# EAGLE board LilyPad_Rainbow_LED_Panel_v10 (EAGLE 7.5.0), part 1 of 4
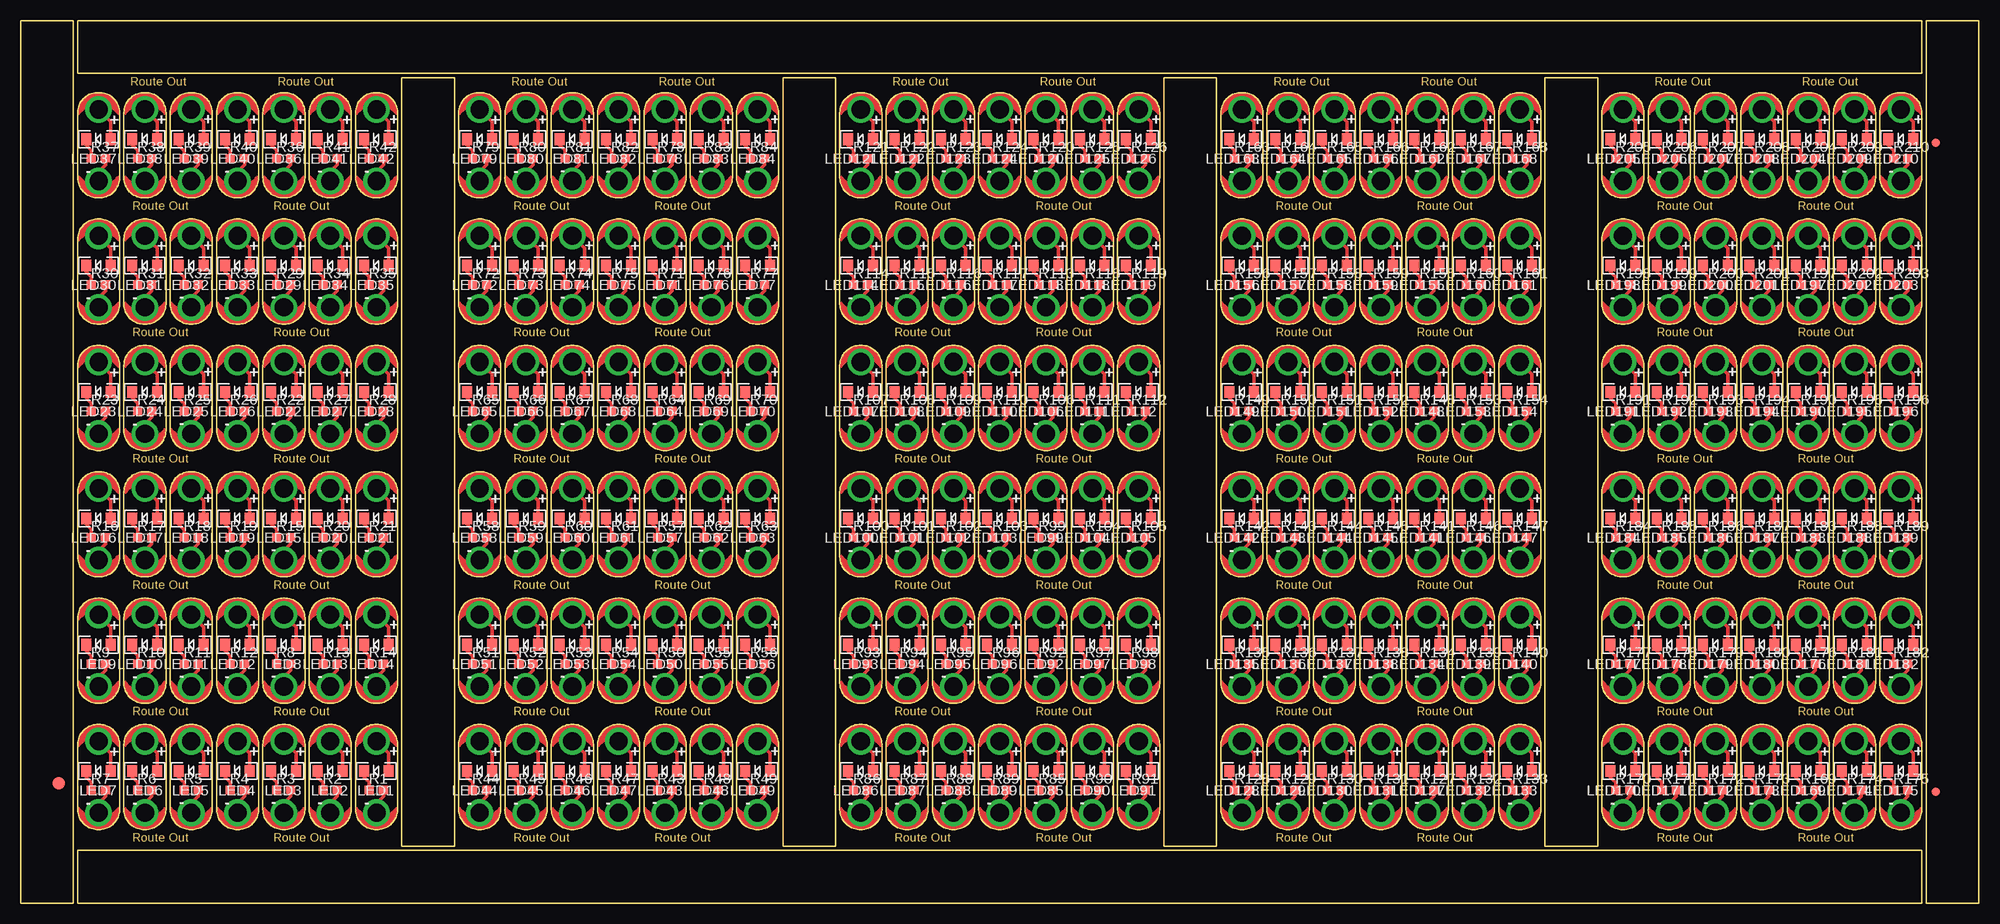
[diagram p0: board, top side]
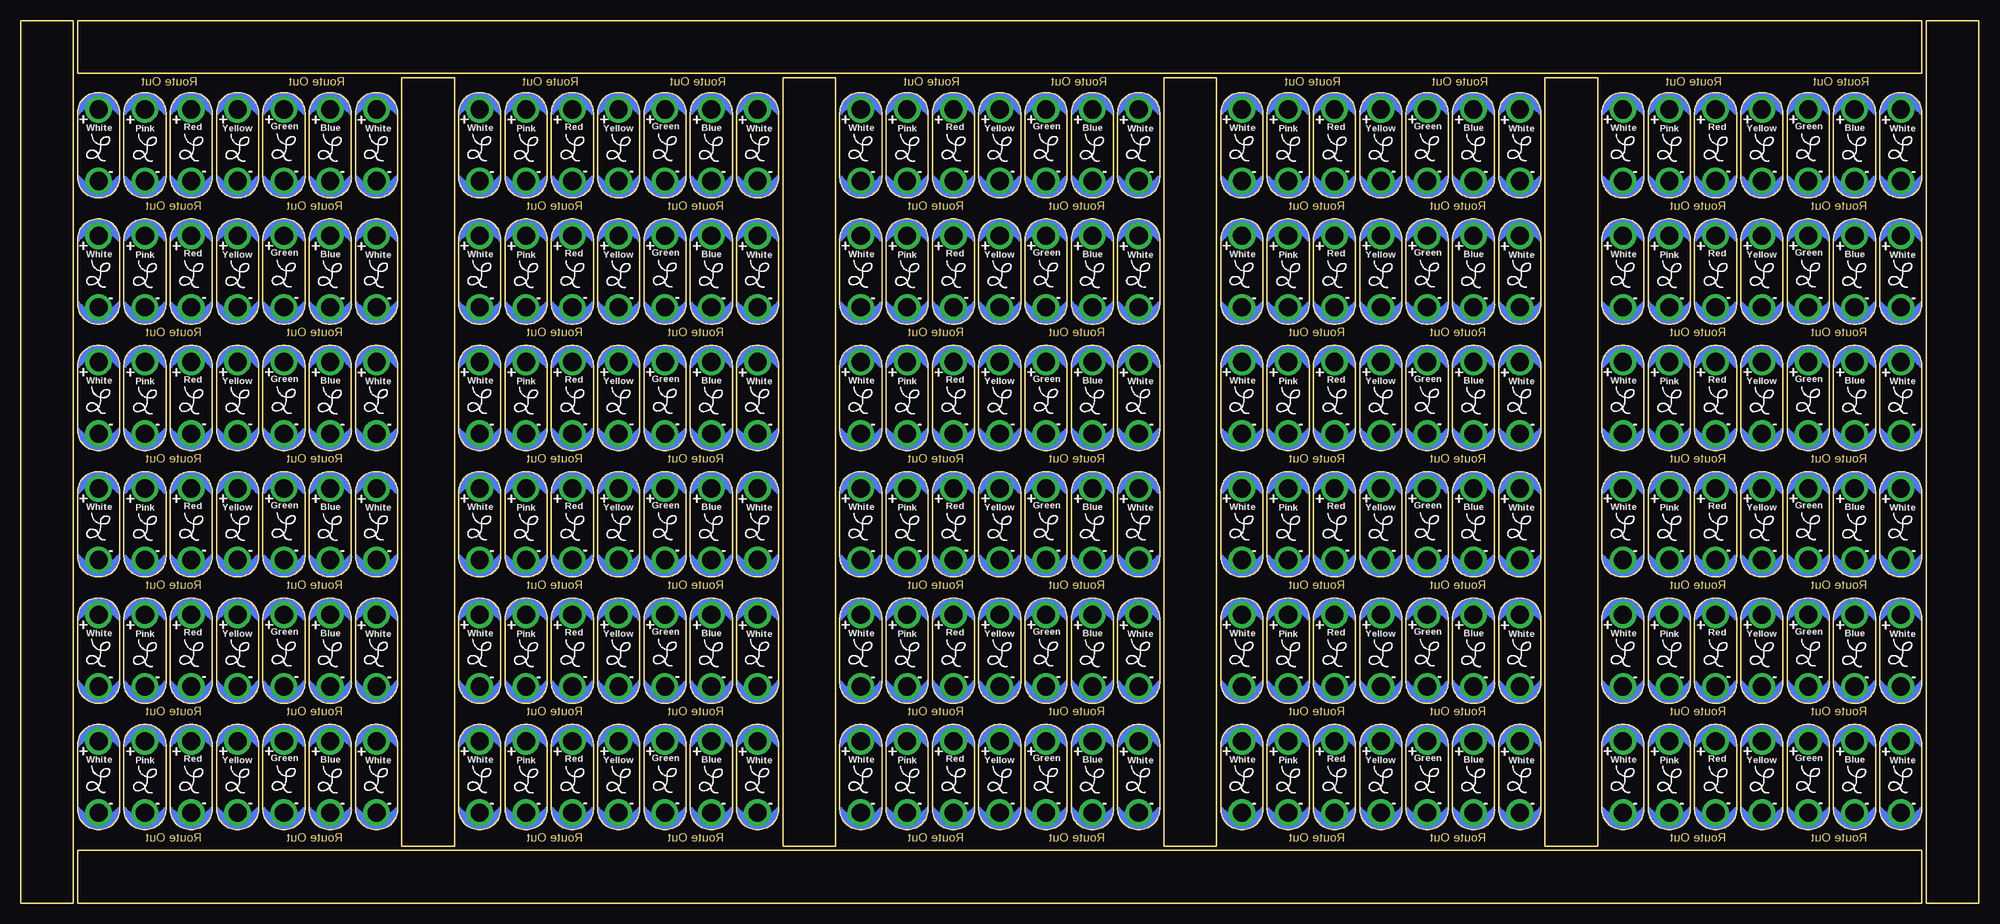
[diagram p1: board, bottom side, seen from below]

Size 236.22 x 106.43 mm. Coordinates in mm from the lower left corner, seen from the top.
Outline: 1308 segments
Copper layers (1*16): Top 0.035mm / dielectric 1.5mm / Bottom 0.035mm
Design rules "SparkFun-2-layer-STANDARD": minimum track width 10mil, minimum drill 20mil, track to track 10mil, track to pad 8mil, pad to pad 8mil, via to via 10mil, smd to smd 8mil, copper to edge 8mil, drill to drill 8mil, minimum pad ring 10mil, minimum via ring 10mil, stop-mask expansion 4mil, vias tented up to drill 25mil, thermal gap 10mil

## Footprints (pad centres in the part's own frame; a part is rotated, then mirrored left to right if it is on the bottom)
FIDUCIAL-1.5X3 = smd 1.5 x 1.5: 1 0,0
FIDUCIAL-1X2 = smd 1 x 1: 1 0,0
LED-1206 = smd 1.2 x 1.4: A -1.5,0; C 1.5,0
PETAL-SMALL-2SIDE = drill 2.2: 1 0,0
0603-RES = smd 1.1 x 1: 1 -0.85,0; 2 0.85,0

## Placement (x,y rotation side)
E$1  [FIDUCIAL-1.5X3]  4.57,14.48 0 top
E$13  [FIDUCIAL-1X2]  231.01,13.46 0 top
E$14  [FIDUCIAL-1X2]  231.01,91.69 180 top
LED1  WHITE  [LED-1206]  42.91,15.93 180 top
LED2  PINK  [LED-1206]  37.32,15.93 180 top
LED3  RED  [LED-1206]  31.73,15.93 180 top
LED4  YELLOW  [LED-1206]  26.14,15.93 180 top
LED5  GREEN  [LED-1206]  20.55,15.93 180 top
LED6  BLUE  [LED-1206]  14.97,15.93 180 top
LED7  WHITE  [LED-1206]  9.38,15.93 180 top
LED8  RED  [LED-1206]  31.73,31.17 180 top
LED9  WHITE  [LED-1206]  9.38,31.17 180 top
LED10  BLUE  [LED-1206]  14.97,31.17 180 top
LED11  GREEN  [LED-1206]  20.55,31.17 180 top
LED12  YELLOW  [LED-1206]  26.14,31.17 180 top
LED13  PINK  [LED-1206]  37.32,31.17 180 top
LED14  WHITE  [LED-1206]  42.91,31.17 180 top
LED15  RED  [LED-1206]  31.73,46.41 180 top
LED16  WHITE  [LED-1206]  9.38,46.41 180 top
LED17  BLUE  [LED-1206]  14.97,46.41 180 top
LED18  GREEN  [LED-1206]  20.55,46.41 180 top
LED19  YELLOW  [LED-1206]  26.14,46.41 180 top
LED20  PINK  [LED-1206]  37.32,46.41 180 top
LED21  WHITE  [LED-1206]  42.91,46.41 180 top
LED22  RED  [LED-1206]  31.73,61.65 180 top
LED23  WHITE  [LED-1206]  9.38,61.65 180 top
LED24  BLUE  [LED-1206]  14.97,61.65 180 top
LED25  GREEN  [LED-1206]  20.55,61.65 180 top
LED26  YELLOW  [LED-1206]  26.14,61.65 180 top
LED27  PINK  [LED-1206]  37.32,61.65 180 top
LED28  WHITE  [LED-1206]  42.91,61.65 180 top
LED29  RED  [LED-1206]  31.73,76.89 180 top
LED30  WHITE  [LED-1206]  9.38,76.89 180 top
LED31  BLUE  [LED-1206]  14.97,76.89 180 top
LED32  GREEN  [LED-1206]  20.55,76.89 180 top
LED33  YELLOW  [LED-1206]  26.14,76.89 180 top
LED34  PINK  [LED-1206]  37.32,76.89 180 top
LED35  WHITE  [LED-1206]  42.91,76.89 180 top
LED36  RED  [LED-1206]  31.73,92.13 180 top
LED37  WHITE  [LED-1206]  9.38,92.13 180 top
LED38  BLUE  [LED-1206]  14.97,92.13 180 top
LED39  GREEN  [LED-1206]  20.55,92.13 180 top
LED40  YELLOW  [LED-1206]  26.14,92.13 180 top
LED41  PINK  [LED-1206]  37.32,92.13 180 top
LED42  WHITE  [LED-1206]  42.91,92.13 180 top
LED43  RED  [LED-1206]  77.7,15.93 180 top
LED44  WHITE  [LED-1206]  55.35,15.93 180 top
LED45  BLUE  [LED-1206]  60.94,15.93 180 top
LED46  GREEN  [LED-1206]  66.53,15.93 180 top
LED47  YELLOW  [LED-1206]  72.12,15.93 180 top
LED48  PINK  [LED-1206]  83.29,15.93 180 top
LED49  WHITE  [LED-1206]  88.88,15.93 180 top
LED50  RED  [LED-1206]  77.7,31.17 180 top
LED51  WHITE  [LED-1206]  55.35,31.17 180 top
LED52  BLUE  [LED-1206]  60.94,31.17 180 top
LED53  GREEN  [LED-1206]  66.53,31.17 180 top
LED54  YELLOW  [LED-1206]  72.12,31.17 180 top
LED55  PINK  [LED-1206]  83.29,31.17 180 top
LED56  WHITE  [LED-1206]  88.88,31.17 180 top
LED57  RED  [LED-1206]  77.7,46.41 180 top
LED58  WHITE  [LED-1206]  55.35,46.41 180 top
LED59  BLUE  [LED-1206]  60.94,46.41 180 top
LED60  GREEN  [LED-1206]  66.53,46.41 180 top
LED61  YELLOW  [LED-1206]  72.12,46.41 180 top
LED62  PINK  [LED-1206]  83.29,46.41 180 top
LED63  WHITE  [LED-1206]  88.88,46.41 180 top
LED64  RED  [LED-1206]  77.7,61.65 180 top
LED65  WHITE  [LED-1206]  55.35,61.65 180 top
LED66  BLUE  [LED-1206]  60.94,61.65 180 top
LED67  GREEN  [LED-1206]  66.53,61.65 180 top
LED68  YELLOW  [LED-1206]  72.12,61.65 180 top
LED69  PINK  [LED-1206]  83.29,61.65 180 top
LED70  WHITE  [LED-1206]  88.88,61.65 180 top
LED71  RED  [LED-1206]  77.7,76.89 180 top
LED72  WHITE  [LED-1206]  55.35,76.89 180 top
LED73  BLUE  [LED-1206]  60.94,76.89 180 top
LED74  GREEN  [LED-1206]  66.53,76.89 180 top
LED75  YELLOW  [LED-1206]  72.12,76.89 180 top
LED76  PINK  [LED-1206]  83.29,76.89 180 top
LED77  WHITE  [LED-1206]  88.88,76.89 180 top
LED78  RED  [LED-1206]  77.7,92.13 180 top
LED79  WHITE  [LED-1206]  55.35,92.13 180 top
LED80  BLUE  [LED-1206]  60.94,92.13 180 top
LED81  GREEN  [LED-1206]  66.53,92.13 180 top
LED82  YELLOW  [LED-1206]  72.12,92.13 180 top
LED83  PINK  [LED-1206]  83.29,92.13 180 top
LED84  WHITE  [LED-1206]  88.88,92.13 180 top
LED85  RED  [LED-1206]  123.68,15.93 180 top
LED86  WHITE  [LED-1206]  101.33,15.93 180 top
LED87  BLUE  [LED-1206]  106.91,15.93 180 top
LED88  GREEN  [LED-1206]  112.5,15.93 180 top
LED89  YELLOW  [LED-1206]  118.09,15.93 180 top
LED90  PINK  [LED-1206]  129.27,15.93 180 top
LED91  WHITE  [LED-1206]  134.85,15.93 180 top
LED92  RED  [LED-1206]  123.68,31.17 180 top
LED93  WHITE  [LED-1206]  101.33,31.17 180 top
LED94  BLUE  [LED-1206]  106.91,31.17 180 top
LED95  GREEN  [LED-1206]  112.5,31.17 180 top
LED96  YELLOW  [LED-1206]  118.09,31.17 180 top
LED97  PINK  [LED-1206]  129.27,31.17 180 top
LED98  WHITE  [LED-1206]  134.85,31.17 180 top
LED99  RED  [LED-1206]  123.68,46.41 180 top
LED100  WHITE  [LED-1206]  101.33,46.41 180 top
LED101  BLUE  [LED-1206]  106.91,46.41 180 top
LED102  GREEN  [LED-1206]  112.5,46.41 180 top
LED103  YELLOW  [LED-1206]  118.09,46.41 180 top
LED104  PINK  [LED-1206]  129.27,46.41 180 top
LED105  WHITE  [LED-1206]  134.85,46.41 180 top
LED106  RED  [LED-1206]  123.68,61.65 180 top
LED107  WHITE  [LED-1206]  101.33,61.65 180 top
LED108  BLUE  [LED-1206]  106.91,61.65 180 top
LED109  GREEN  [LED-1206]  112.5,61.65 180 top
LED110  YELLOW  [LED-1206]  118.09,61.65 180 top
LED111  PINK  [LED-1206]  129.27,61.65 180 top
LED112  WHITE  [LED-1206]  134.85,61.65 180 top
LED113  RED  [LED-1206]  123.68,76.89 180 top
LED114  WHITE  [LED-1206]  101.33,76.89 180 top
LED115  BLUE  [LED-1206]  106.91,76.89 180 top
LED116  GREEN  [LED-1206]  112.5,76.89 180 top
LED117  YELLOW  [LED-1206]  118.09,76.89 180 top
LED118  PINK  [LED-1206]  129.27,76.89 180 top
LED119  WHITE  [LED-1206]  134.85,76.89 180 top
LED120  RED  [LED-1206]  123.68,92.13 180 top
LED121  WHITE  [LED-1206]  101.33,92.13 180 top
LED122  BLUE  [LED-1206]  106.91,92.13 180 top
LED123  GREEN  [LED-1206]  112.5,92.13 180 top
LED124  YELLOW  [LED-1206]  118.09,92.13 180 top
LED125  PINK  [LED-1206]  129.27,92.13 180 top
LED126  WHITE  [LED-1206]  134.85,92.13 180 top
LED127  RED  [LED-1206]  169.65,15.93 180 top
LED128  WHITE  [LED-1206]  147.3,15.93 180 top
LED129  BLUE  [LED-1206]  152.89,15.93 180 top
LED130  GREEN  [LED-1206]  158.48,15.93 180 top
LED131  YELLOW  [LED-1206]  164.06,15.93 180 top
LED132  PINK  [LED-1206]  175.24,15.93 180 top
LED133  WHITE  [LED-1206]  180.83,15.93 180 top
LED134  RED  [LED-1206]  169.65,31.17 180 top
LED135  WHITE  [LED-1206]  147.3,31.17 180 top
LED136  BLUE  [LED-1206]  152.89,31.17 180 top
LED137  GREEN  [LED-1206]  158.48,31.17 180 top
LED138  YELLOW  [LED-1206]  164.06,31.17 180 top
LED139  PINK  [LED-1206]  175.24,31.17 180 top
LED140  WHITE  [LED-1206]  180.83,31.17 180 top
LED141  RED  [LED-1206]  169.65,46.41 180 top
LED142  WHITE  [LED-1206]  147.3,46.41 180 top
LED143  BLUE  [LED-1206]  152.89,46.41 180 top
LED144  GREEN  [LED-1206]  158.48,46.41 180 top
LED145  YELLOW  [LED-1206]  164.06,46.41 180 top
LED146  PINK  [LED-1206]  175.24,46.41 180 top
LED147  WHITE  [LED-1206]  180.83,46.41 180 top
LED148  RED  [LED-1206]  169.65,61.65 180 top
LED149  WHITE  [LED-1206]  147.3,61.65 180 top
LED150  BLUE  [LED-1206]  152.89,61.65 180 top
LED151  GREEN  [LED-1206]  158.48,61.65 180 top
LED152  YELLOW  [LED-1206]  164.06,61.65 180 top
LED153  PINK  [LED-1206]  175.24,61.65 180 top
LED154  WHITE  [LED-1206]  180.83,61.65 180 top
LED155  RED  [LED-1206]  169.65,76.89 180 top
LED156  WHITE  [LED-1206]  147.3,76.89 180 top
LED157  BLUE  [LED-1206]  152.89,76.89 180 top
LED158  GREEN  [LED-1206]  158.48,76.89 180 top
LED159  YELLOW  [LED-1206]  164.06,76.89 180 top
LED160  PINK  [LED-1206]  175.24,76.89 180 top
LED161  WHITE  [LED-1206]  180.83,76.89 180 top
LED162  RED  [LED-1206]  169.65,92.13 180 top
LED163  WHITE  [LED-1206]  147.3,92.13 180 top
LED164  BLUE  [LED-1206]  152.89,92.13 180 top
LED165  GREEN  [LED-1206]  158.48,92.13 180 top
LED166  YELLOW  [LED-1206]  164.06,92.13 180 top
LED167  PINK  [LED-1206]  175.24,92.13 180 top
LED168  WHITE  [LED-1206]  180.83,92.13 180 top
LED169  RED  [LED-1206]  215.63,15.93 180 top
LED170  WHITE  [LED-1206]  193.27,15.93 180 top
LED171  BLUE  [LED-1206]  198.86,15.93 180 top
LED172  GREEN  [LED-1206]  204.45,15.93 180 top
LED173  YELLOW  [LED-1206]  210.04,15.93 180 top
LED174  PINK  [LED-1206]  221.21,15.93 180 top
LED175  WHITE  [LED-1206]  226.8,15.93 180 top
LED176  RED  [LED-1206]  215.63,31.17 180 top
LED177  WHITE  [LED-1206]  193.27,31.17 180 top
LED178  BLUE  [LED-1206]  198.86,31.17 180 top
LED179  GREEN  [LED-1206]  204.45,31.17 180 top
LED180  YELLOW  [LED-1206]  210.04,31.17 180 top
LED181  PINK  [LED-1206]  221.21,31.17 180 top
LED182  WHITE  [LED-1206]  226.8,31.17 180 top
LED183  RED  [LED-1206]  215.63,46.41 180 top
LED184  WHITE  [LED-1206]  193.27,46.41 180 top
LED185  BLUE  [LED-1206]  198.86,46.41 180 top
LED186  GREEN  [LED-1206]  204.45,46.41 180 top
LED187  YELLOW  [LED-1206]  210.04,46.41 180 top
LED188  PINK  [LED-1206]  221.21,46.41 180 top
LED189  WHITE  [LED-1206]  226.8,46.41 180 top
LED190  RED  [LED-1206]  215.63,61.65 180 top
LED191  WHITE  [LED-1206]  193.27,61.65 180 top
LED192  BLUE  [LED-1206]  198.86,61.65 180 top
LED193  GREEN  [LED-1206]  204.45,61.65 180 top
LED194  YELLOW  [LED-1206]  210.04,61.65 180 top
LED195  PINK  [LED-1206]  221.21,61.65 180 top
LED196  WHITE  [LED-1206]  226.8,61.65 180 top
LED197  RED  [LED-1206]  215.63,76.89 180 top
LED198  WHITE  [LED-1206]  193.27,76.89 180 top
LED199  BLUE  [LED-1206]  198.86,76.89 180 top
LED200  GREEN  [LED-1206]  204.45,76.89 180 top
LED201  YELLOW  [LED-1206]  210.04,76.89 180 top
LED202  PINK  [LED-1206]  221.21,76.89 180 top
LED203  WHITE  [LED-1206]  226.8,76.89 180 top
LED204  RED  [LED-1206]  215.63,92.13 180 top
LED205  WHITE  [LED-1206]  193.27,92.13 180 top
LED206  BLUE  [LED-1206]  198.86,92.13 180 top
LED207  GREEN  [LED-1206]  204.45,92.13 180 top
LED208  YELLOW  [LED-1206]  210.04,92.13 180 top
LED209  PINK  [LED-1206]  221.21,92.13 180 top
LED210  WHITE  [LED-1206]  226.8,92.13 180 top
LED+1  SEWTAP6  [PETAL-SMALL-2SIDE]  42.93,19.53 180 top
LED+2  SEWTAP6  [PETAL-SMALL-2SIDE]  37.34,19.53 180 top
LED+3  SEWTAP6  [PETAL-SMALL-2SIDE]  31.75,19.53 180 top
LED+4  SEWTAP6  [PETAL-SMALL-2SIDE]  26.16,19.53 180 top
LED+5  SEWTAP6  [PETAL-SMALL-2SIDE]  20.57,19.53 180 top
LED+6  SEWTAP6  [PETAL-SMALL-2SIDE]  14.99,19.53 180 top
LED+7  SEWTAP6  [PETAL-SMALL-2SIDE]  9.4,19.53 180 top
LED+8  SEWTAP6  [PETAL-SMALL-2SIDE]  31.75,34.77 180 top
LED+9  SEWTAP6  [PETAL-SMALL-2SIDE]  9.4,34.77 180 top
LED+10  SEWTAP6  [PETAL-SMALL-2SIDE]  14.99,34.77 180 top
LED+11  SEWTAP6  [PETAL-SMALL-2SIDE]  20.57,34.77 180 top
LED+12  SEWTAP6  [PETAL-SMALL-2SIDE]  26.16,34.77 180 top
LED+13  SEWTAP6  [PETAL-SMALL-2SIDE]  37.34,34.77 180 top
LED+14  SEWTAP6  [PETAL-SMALL-2SIDE]  42.93,34.77 180 top
LED+15  SEWTAP6  [PETAL-SMALL-2SIDE]  31.75,50.01 180 top
LED+16  SEWTAP6  [PETAL-SMALL-2SIDE]  9.4,50.01 180 top
LED+17  SEWTAP6  [PETAL-SMALL-2SIDE]  14.99,50.01 180 top
LED+18  SEWTAP6  [PETAL-SMALL-2SIDE]  20.57,50.01 180 top
LED+19  SEWTAP6  [PETAL-SMALL-2SIDE]  26.16,50.01 180 top
LED+20  SEWTAP6  [PETAL-SMALL-2SIDE]  37.34,50.01 180 top
LED+21  SEWTAP6  [PETAL-SMALL-2SIDE]  42.93,50.01 180 top
LED+22  SEWTAP6  [PETAL-SMALL-2SIDE]  31.75,65.25 180 top
LED+23  SEWTAP6  [PETAL-SMALL-2SIDE]  9.4,65.25 180 top
LED+24  SEWTAP6  [PETAL-SMALL-2SIDE]  14.99,65.25 180 top
LED+25  SEWTAP6  [PETAL-SMALL-2SIDE]  20.57,65.25 180 top
LED+26  SEWTAP6  [PETAL-SMALL-2SIDE]  26.16,65.25 180 top
LED+27  SEWTAP6  [PETAL-SMALL-2SIDE]  37.34,65.25 180 top
LED+28  SEWTAP6  [PETAL-SMALL-2SIDE]  42.93,65.25 180 top
LED+29  SEWTAP6  [PETAL-SMALL-2SIDE]  31.75,80.49 180 top
LED+30  SEWTAP6  [PETAL-SMALL-2SIDE]  9.4,80.49 180 top
LED+31  SEWTAP6  [PETAL-SMALL-2SIDE]  14.99,80.49 180 top
LED+32  SEWTAP6  [PETAL-SMALL-2SIDE]  20.57,80.49 180 top
LED+33  SEWTAP6  [PETAL-SMALL-2SIDE]  26.16,80.49 180 top
LED+34  SEWTAP6  [PETAL-SMALL-2SIDE]  37.34,80.49 180 top
LED+35  SEWTAP6  [PETAL-SMALL-2SIDE]  42.93,80.49 180 top
LED+36  SEWTAP6  [PETAL-SMALL-2SIDE]  31.75,95.73 180 top
LED+37  SEWTAP6  [PETAL-SMALL-2SIDE]  9.4,95.73 180 top
LED+38  SEWTAP6  [PETAL-SMALL-2SIDE]  14.99,95.73 180 top
LED+39  SEWTAP6  [PETAL-SMALL-2SIDE]  20.57,95.73 180 top
LED+40  SEWTAP6  [PETAL-SMALL-2SIDE]  26.16,95.73 180 top
LED+41  SEWTAP6  [PETAL-SMALL-2SIDE]  37.34,95.73 180 top
LED+42  SEWTAP6  [PETAL-SMALL-2SIDE]  42.93,95.73 180 top
LED+43  SEWTAP6  [PETAL-SMALL-2SIDE]  77.72,19.53 180 top
LED+44  SEWTAP6  [PETAL-SMALL-2SIDE]  55.37,19.53 180 top
LED+45  SEWTAP6  [PETAL-SMALL-2SIDE]  60.96,19.53 180 top
LED+46  SEWTAP6  [PETAL-SMALL-2SIDE]  66.55,19.53 180 top
LED+47  SEWTAP6  [PETAL-SMALL-2SIDE]  72.14,19.53 180 top
LED+48  SEWTAP6  [PETAL-SMALL-2SIDE]  83.31,19.53 180 top
LED+49  SEWTAP6  [PETAL-SMALL-2SIDE]  88.9,19.53 180 top
LED+50  SEWTAP6  [PETAL-SMALL-2SIDE]  77.72,34.77 180 top
LED+51  SEWTAP6  [PETAL-SMALL-2SIDE]  55.37,34.77 180 top
LED+52  SEWTAP6  [PETAL-SMALL-2SIDE]  60.96,34.77 180 top
LED+53  SEWTAP6  [PETAL-SMALL-2SIDE]  66.55,34.77 180 top
LED+54  SEWTAP6  [PETAL-SMALL-2SIDE]  72.14,34.77 180 top
LED+55  SEWTAP6  [PETAL-SMALL-2SIDE]  83.31,34.77 180 top
LED+56  SEWTAP6  [PETAL-SMALL-2SIDE]  88.9,34.77 180 top
LED+57  SEWTAP6  [PETAL-SMALL-2SIDE]  77.72,50.01 180 top
LED+58  SEWTAP6  [PETAL-SMALL-2SIDE]  55.37,50.01 180 top
LED+59  SEWTAP6  [PETAL-SMALL-2SIDE]  60.96,50.01 180 top
LED+60  SEWTAP6  [PETAL-SMALL-2SIDE]  66.55,50.01 180 top
LED+61  SEWTAP6  [PETAL-SMALL-2SIDE]  72.14,50.01 180 top
LED+62  SEWTAP6  [PETAL-SMALL-2SIDE]  83.31,50.01 180 top
LED+63  SEWTAP6  [PETAL-SMALL-2SIDE]  88.9,50.01 180 top
LED+64  SEWTAP6  [PETAL-SMALL-2SIDE]  77.72,65.25 180 top
LED+65  SEWTAP6  [PETAL-SMALL-2SIDE]  55.37,65.25 180 top
LED+66  SEWTAP6  [PETAL-SMALL-2SIDE]  60.96,65.25 180 top
LED+67  SEWTAP6  [PETAL-SMALL-2SIDE]  66.55,65.25 180 top
LED+68  SEWTAP6  [PETAL-SMALL-2SIDE]  72.14,65.25 180 top
LED+69  SEWTAP6  [PETAL-SMALL-2SIDE]  83.31,65.25 180 top
LED+70  SEWTAP6  [PETAL-SMALL-2SIDE]  88.9,65.25 180 top
LED+71  SEWTAP6  [PETAL-SMALL-2SIDE]  77.72,80.49 180 top
LED+72  SEWTAP6  [PETAL-SMALL-2SIDE]  55.37,80.49 180 top
LED+73  SEWTAP6  [PETAL-SMALL-2SIDE]  60.96,80.49 180 top
LED+74  SEWTAP6  [PETAL-SMALL-2SIDE]  66.55,80.49 180 top
LED+75  SEWTAP6  [PETAL-SMALL-2SIDE]  72.14,80.49 180 top
LED+76  SEWTAP6  [PETAL-SMALL-2SIDE]  83.31,80.49 180 top
LED+77  SEWTAP6  [PETAL-SMALL-2SIDE]  88.9,80.49 180 top
LED+78  SEWTAP6  [PETAL-SMALL-2SIDE]  77.72,95.73 180 top
LED+79  SEWTAP6  [PETAL-SMALL-2SIDE]  55.37,95.73 180 top
LED+80  SEWTAP6  [PETAL-SMALL-2SIDE]  60.96,95.73 180 top
LED+81  SEWTAP6  [PETAL-SMALL-2SIDE]  66.55,95.73 180 top
LED+82  SEWTAP6  [PETAL-SMALL-2SIDE]  72.14,95.73 180 top
LED+83  SEWTAP6  [PETAL-SMALL-2SIDE]  83.31,95.73 180 top
LED+84  SEWTAP6  [PETAL-SMALL-2SIDE]  88.9,95.73 180 top
LED+85  SEWTAP6  [PETAL-SMALL-2SIDE]  123.7,19.53 180 top
LED+86  SEWTAP6  [PETAL-SMALL-2SIDE]  101.35,19.53 180 top
LED+87  SEWTAP6  [PETAL-SMALL-2SIDE]  106.93,19.53 180 top
LED+88  SEWTAP6  [PETAL-SMALL-2SIDE]  112.52,19.53 180 top
LED+89  SEWTAP6  [PETAL-SMALL-2SIDE]  118.11,19.53 180 top
LED+90  SEWTAP6  [PETAL-SMALL-2SIDE]  129.29,19.53 180 top
LED+91  SEWTAP6  [PETAL-SMALL-2SIDE]  134.87,19.53 180 top
LED+92  SEWTAP6  [PETAL-SMALL-2SIDE]  123.7,34.77 180 top
LED+93  SEWTAP6  [PETAL-SMALL-2SIDE]  101.35,34.77 180 top
LED+94  SEWTAP6  [PETAL-SMALL-2SIDE]  106.93,34.77 180 top
LED+95  SEWTAP6  [PETAL-SMALL-2SIDE]  112.52,34.77 180 top
LED+96  SEWTAP6  [PETAL-SMALL-2SIDE]  118.11,34.77 180 top
LED+97  SEWTAP6  [PETAL-SMALL-2SIDE]  129.29,34.77 180 top
LED+98  SEWTAP6  [PETAL-SMALL-2SIDE]  134.87,34.77 180 top
LED+99  SEWTAP6  [PETAL-SMALL-2SIDE]  123.7,50.01 180 top
LED+100  SEWTAP6  [PETAL-SMALL-2SIDE]  101.35,50.01 180 top
LED+101  SEWTAP6  [PETAL-SMALL-2SIDE]  106.93,50.01 180 top
LED+102  SEWTAP6  [PETAL-SMALL-2SIDE]  112.52,50.01 180 top
LED+103  SEWTAP6  [PETAL-SMALL-2SIDE]  118.11,50.01 180 top
LED+104  SEWTAP6  [PETAL-SMALL-2SIDE]  129.29,50.01 180 top
LED+105  SEWTAP6  [PETAL-SMALL-2SIDE]  134.87,50.01 180 top
LED+106  SEWTAP6  [PETAL-SMALL-2SIDE]  123.7,65.25 180 top
LED+107  SEWTAP6  [PETAL-SMALL-2SIDE]  101.35,65.25 180 top
LED+108  SEWTAP6  [PETAL-SMALL-2SIDE]  106.93,65.25 180 top
LED+109  SEWTAP6  [PETAL-SMALL-2SIDE]  112.52,65.25 180 top
LED+110  SEWTAP6  [PETAL-SMALL-2SIDE]  118.11,65.25 180 top
LED+111  SEWTAP6  [PETAL-SMALL-2SIDE]  129.29,65.25 180 top
LED+112  SEWTAP6  [PETAL-SMALL-2SIDE]  134.87,65.25 180 top
LED+113  SEWTAP6  [PETAL-SMALL-2SIDE]  123.7,80.49 180 top
LED+114  SEWTAP6  [PETAL-SMALL-2SIDE]  101.35,80.49 180 top
LED+115  SEWTAP6  [PETAL-SMALL-2SIDE]  106.93,80.49 180 top
LED+116  SEWTAP6  [PETAL-SMALL-2SIDE]  112.52,80.49 180 top
LED+117  SEWTAP6  [PETAL-SMALL-2SIDE]  118.11,80.49 180 top
LED+118  SEWTAP6  [PETAL-SMALL-2SIDE]  129.29,80.49 180 top
LED+119  SEWTAP6  [PETAL-SMALL-2SIDE]  134.87,80.49 180 top
LED+120  SEWTAP6  [PETAL-SMALL-2SIDE]  123.7,95.73 180 top
LED+121  SEWTAP6  [PETAL-SMALL-2SIDE]  101.35,95.73 180 top
LED+122  SEWTAP6  [PETAL-SMALL-2SIDE]  106.93,95.73 180 top
LED+123  SEWTAP6  [PETAL-SMALL-2SIDE]  112.52,95.73 180 top
LED+124  SEWTAP6  [PETAL-SMALL-2SIDE]  118.11,95.73 180 top
LED+125  SEWTAP6  [PETAL-SMALL-2SIDE]  129.29,95.73 180 top
LED+126  SEWTAP6  [PETAL-SMALL-2SIDE]  134.87,95.73 180 top
LED+127  SEWTAP6  [PETAL-SMALL-2SIDE]  169.67,19.53 180 top
LED+128  SEWTAP6  [PETAL-SMALL-2SIDE]  147.32,19.53 180 top
LED+129  SEWTAP6  [PETAL-SMALL-2SIDE]  152.91,19.53 180 top
LED+130  SEWTAP6  [PETAL-SMALL-2SIDE]  158.5,19.53 180 top
LED+131  SEWTAP6  [PETAL-SMALL-2SIDE]  164.08,19.53 180 top
LED+132  SEWTAP6  [PETAL-SMALL-2SIDE]  175.26,19.53 180 top
LED+133  SEWTAP6  [PETAL-SMALL-2SIDE]  180.85,19.53 180 top
LED+134  SEWTAP6  [PETAL-SMALL-2SIDE]  169.67,34.77 180 top
LED+135  SEWTAP6  [PETAL-SMALL-2SIDE]  147.32,34.77 180 top
LED+136  SEWTAP6  [PETAL-SMALL-2SIDE]  152.91,34.77 180 top
LED+137  SEWTAP6  [PETAL-SMALL-2SIDE]  158.5,34.77 180 top
LED+138  SEWTAP6  [PETAL-SMALL-2SIDE]  164.08,34.77 180 top
LED+139  SEWTAP6  [PETAL-SMALL-2SIDE]  175.26,34.77 180 top
LED+140  SEWTAP6  [PETAL-SMALL-2SIDE]  180.85,34.77 180 top
LED+141  SEWTAP6  [PETAL-SMALL-2SIDE]  169.67,50.01 180 top
LED+142  SEWTAP6  [PETAL-SMALL-2SIDE]  147.32,50.01 180 top
LED+143  SEWTAP6  [PETAL-SMALL-2SIDE]  152.91,50.01 180 top
LED+144  SEWTAP6  [PETAL-SMALL-2SIDE]  158.5,50.01 180 top
LED+145  SEWTAP6  [PETAL-SMALL-2SIDE]  164.08,50.01 180 top
LED+146  SEWTAP6  [PETAL-SMALL-2SIDE]  175.26,50.01 180 top
LED+147  SEWTAP6  [PETAL-SMALL-2SIDE]  180.85,50.01 180 top
LED+148  SEWTAP6  [PETAL-SMALL-2SIDE]  169.67,65.25 180 top
LED+149  SEWTAP6  [PETAL-SMALL-2SIDE]  147.32,65.25 180 top
LED+150  SEWTAP6  [PETAL-SMALL-2SIDE]  152.91,65.25 180 top
LED+151  SEWTAP6  [PETAL-SMALL-2SIDE]  158.5,65.25 180 top
LED+152  SEWTAP6  [PETAL-SMALL-2SIDE]  164.08,65.25 180 top
LED+153  SEWTAP6  [PETAL-SMALL-2SIDE]  175.26,65.25 180 top
LED+154  SEWTAP6  [PETAL-SMALL-2SIDE]  180.85,65.25 180 top
LED+155  SEWTAP6  [PETAL-SMALL-2SIDE]  169.67,80.49 180 top
LED+156  SEWTAP6  [PETAL-SMALL-2SIDE]  147.32,80.49 180 top
LED+157  SEWTAP6  [PETAL-SMALL-2SIDE]  152.91,80.49 180 top
LED+158  SEWTAP6  [PETAL-SMALL-2SIDE]  158.5,80.49 180 top
LED+159  SEWTAP6  [PETAL-SMALL-2SIDE]  164.08,80.49 180 top
LED+160  SEWTAP6  [PETAL-SMALL-2SIDE]  175.26,80.49 180 top
LED+161  SEWTAP6  [PETAL-SMALL-2SIDE]  180.85,80.49 180 top
LED+162  SEWTAP6  [PETAL-SMALL-2SIDE]  169.67,95.73 180 top
LED+163  SEWTAP6  [PETAL-SMALL-2SIDE]  147.32,95.73 180 top
LED+164  SEWTAP6  [PETAL-SMALL-2SIDE]  152.91,95.73 180 top
LED+165  SEWTAP6  [PETAL-SMALL-2SIDE]  158.5,95.73 180 top
LED+166  SEWTAP6  [PETAL-SMALL-2SIDE]  164.08,95.73 180 top
LED+167  SEWTAP6  [PETAL-SMALL-2SIDE]  175.26,95.73 180 top
LED+168  SEWTAP6  [PETAL-SMALL-2SIDE]  180.85,95.73 180 top
LED+169  SEWTAP6  [PETAL-SMALL-2SIDE]  215.65,19.53 180 top
LED+170  SEWTAP6  [PETAL-SMALL-2SIDE]  193.29,19.53 180 top
LED+171  SEWTAP6  [PETAL-SMALL-2SIDE]  198.88,19.53 180 top
LED+172  SEWTAP6  [PETAL-SMALL-2SIDE]  204.47,19.53 180 top
LED+173  SEWTAP6  [PETAL-SMALL-2SIDE]  210.06,19.53 180 top
LED+174  SEWTAP6  [PETAL-SMALL-2SIDE]  221.23,19.53 180 top
LED+175  SEWTAP6  [PETAL-SMALL-2SIDE]  226.82,19.53 180 top
LED+176  SEWTAP6  [PETAL-SMALL-2SIDE]  215.65,34.77 180 top
LED+177  SEWTAP6  [PETAL-SMALL-2SIDE]  193.29,34.77 180 top
LED+178  SEWTAP6  [PETAL-SMALL-2SIDE]  198.88,34.77 180 top
LED+179  SEWTAP6  [PETAL-SMALL-2SIDE]  204.47,34.77 180 top
LED+180  SEWTAP6  [PETAL-SMALL-2SIDE]  210.06,34.77 180 top
LED+181  SEWTAP6  [PETAL-SMALL-2SIDE]  221.23,34.77 180 top
LED+182  SEWTAP6  [PETAL-SMALL-2SIDE]  226.82,34.77 180 top
LED+183  SEWTAP6  [PETAL-SMALL-2SIDE]  215.65,50.01 180 top
LED+184  SEWTAP6  [PETAL-SMALL-2SIDE]  193.29,50.01 180 top
LED+185  SEWTAP6  [PETAL-SMALL-2SIDE]  198.88,50.01 180 top
LED+186  SEWTAP6  [PETAL-SMALL-2SIDE]  204.47,50.01 180 top
LED+187  SEWTAP6  [PETAL-SMALL-2SIDE]  210.06,50.01 180 top
LED+188  SEWTAP6  [PETAL-SMALL-2SIDE]  221.23,50.01 180 top
LED+189  SEWTAP6  [PETAL-SMALL-2SIDE]  226.82,50.01 180 top
LED+190  SEWTAP6  [PETAL-SMALL-2SIDE]  215.65,65.25 180 top
LED+191  SEWTAP6  [PETAL-SMALL-2SIDE]  193.29,65.25 180 top
LED+192  SEWTAP6  [PETAL-SMALL-2SIDE]  198.88,65.25 180 top
LED+193  SEWTAP6  [PETAL-SMALL-2SIDE]  204.47,65.25 180 top
LED+194  SEWTAP6  [PETAL-SMALL-2SIDE]  210.06,65.25 180 top
LED+195  SEWTAP6  [PETAL-SMALL-2SIDE]  221.23,65.25 180 top
LED+196  SEWTAP6  [PETAL-SMALL-2SIDE]  226.82,65.25 180 top
LED+197  SEWTAP6  [PETAL-SMALL-2SIDE]  215.65,80.49 180 top
LED+198  SEWTAP6  [PETAL-SMALL-2SIDE]  193.29,80.49 180 top
LED+199  SEWTAP6  [PETAL-SMALL-2SIDE]  198.88,80.49 180 top
LED+200  SEWTAP6  [PETAL-SMALL-2SIDE]  204.47,80.49 180 top
LED+201  SEWTAP6  [PETAL-SMALL-2SIDE]  210.06,80.49 180 top
LED+202  SEWTAP6  [PETAL-SMALL-2SIDE]  221.23,80.49 180 top
LED+203  SEWTAP6  [PETAL-SMALL-2SIDE]  226.82,80.49 180 top
LED+204  SEWTAP6  [PETAL-SMALL-2SIDE]  215.65,95.73 180 top
LED+205  SEWTAP6  [PETAL-SMALL-2SIDE]  193.29,95.73 180 top
LED+206  SEWTAP6  [PETAL-SMALL-2SIDE]  198.88,95.73 180 top
LED+207  SEWTAP6  [PETAL-SMALL-2SIDE]  204.47,95.73 180 top
LED+208  SEWTAP6  [PETAL-SMALL-2SIDE]  210.06,95.73 180 top
LED+209  SEWTAP6  [PETAL-SMALL-2SIDE]  221.23,95.73 180 top
LED+210  SEWTAP6  [PETAL-SMALL-2SIDE]  226.82,95.73 180 top
LED-1  SEWTAP6  [PETAL-SMALL-2SIDE]  42.93,10.9 0 top
LED-2  SEWTAP6  [PETAL-SMALL-2SIDE]  37.34,10.9 0 top
LED-3  SEWTAP6  [PETAL-SMALL-2SIDE]  31.75,10.9 0 top
LED-4  SEWTAP6  [PETAL-SMALL-2SIDE]  26.16,10.9 0 top
LED-5  SEWTAP6  [PETAL-SMALL-2SIDE]  20.57,10.9 0 top
LED-6  SEWTAP6  [PETAL-SMALL-2SIDE]  14.99,10.9 0 top
LED-7  SEWTAP6  [PETAL-SMALL-2SIDE]  9.4,10.9 0 top
LED-8  SEWTAP6  [PETAL-SMALL-2SIDE]  31.75,26.14 0 top
LED-9  SEWTAP6  [PETAL-SMALL-2SIDE]  9.4,26.14 0 top
LED-10  SEWTAP6  [PETAL-SMALL-2SIDE]  14.99,26.14 0 top
LED-11  SEWTAP6  [PETAL-SMALL-2SIDE]  20.57,26.14 0 top
LED-12  SEWTAP6  [PETAL-SMALL-2SIDE]  26.16,26.14 0 top
LED-13  SEWTAP6  [PETAL-SMALL-2SIDE]  37.34,26.14 0 top
LED-14  SEWTAP6  [PETAL-SMALL-2SIDE]  42.93,26.14 0 top
LED-15  SEWTAP6  [PETAL-SMALL-2SIDE]  31.75,41.38 0 top
LED-16  SEWTAP6  [PETAL-SMALL-2SIDE]  9.4,41.38 0 top
LED-17  SEWTAP6  [PETAL-SMALL-2SIDE]  14.99,41.38 0 top
LED-18  SEWTAP6  [PETAL-SMALL-2SIDE]  20.57,41.38 0 top
LED-19  SEWTAP6  [PETAL-SMALL-2SIDE]  26.16,41.38 0 top
LED-20  SEWTAP6  [PETAL-SMALL-2SIDE]  37.34,41.38 0 top
LED-21  SEWTAP6  [PETAL-SMALL-2SIDE]  42.93,41.38 0 top
LED-22  SEWTAP6  [PETAL-SMALL-2SIDE]  31.75,56.62 0 top
LED-23  SEWTAP6  [PETAL-SMALL-2SIDE]  9.4,56.62 0 top
LED-24  SEWTAP6  [PETAL-SMALL-2SIDE]  14.99,56.62 0 top
LED-25  SEWTAP6  [PETAL-SMALL-2SIDE]  20.57,56.62 0 top
LED-26  SEWTAP6  [PETAL-SMALL-2SIDE]  26.16,56.62 0 top
LED-27  SEWTAP6  [PETAL-SMALL-2SIDE]  37.34,56.62 0 top
LED-28  SEWTAP6  [PETAL-SMALL-2SIDE]  42.93,56.62 0 top
LED-29  SEWTAP6  [PETAL-SMALL-2SIDE]  31.75,71.86 0 top
LED-30  SEWTAP6  [PETAL-SMALL-2SIDE]  9.4,71.86 0 top
LED-31  SEWTAP6  [PETAL-SMALL-2SIDE]  14.99,71.86 0 top
LED-32  SEWTAP6  [PETAL-SMALL-2SIDE]  20.57,71.86 0 top
LED-33  SEWTAP6  [PETAL-SMALL-2SIDE]  26.16,71.86 0 top
LED-34  SEWTAP6  [PETAL-SMALL-2SIDE]  37.34,71.86 0 top
LED-35  SEWTAP6  [PETAL-SMALL-2SIDE]  42.93,71.86 0 top
LED-36  SEWTAP6  [PETAL-SMALL-2SIDE]  31.75,87.1 0 top
LED-37  SEWTAP6  [PETAL-SMALL-2SIDE]  9.4,87.1 0 top
LED-38  SEWTAP6  [PETAL-SMALL-2SIDE]  14.99,87.1 0 top
LED-39  SEWTAP6  [PETAL-SMALL-2SIDE]  20.57,87.1 0 top
LED-40  SEWTAP6  [PETAL-SMALL-2SIDE]  26.16,87.1 0 top
LED-41  SEWTAP6  [PETAL-SMALL-2SIDE]  37.34,87.1 0 top
LED-42  SEWTAP6  [PETAL-SMALL-2SIDE]  42.93,87.1 0 top
LED-43  SEWTAP6  [PETAL-SMALL-2SIDE]  77.72,10.9 0 top
LED-44  SEWTAP6  [PETAL-SMALL-2SIDE]  55.37,10.9 0 top
LED-45  SEWTAP6  [PETAL-SMALL-2SIDE]  60.96,10.9 0 top
LED-46  SEWTAP6  [PETAL-SMALL-2SIDE]  66.55,10.9 0 top
LED-47  SEWTAP6  [PETAL-SMALL-2SIDE]  72.14,10.9 0 top
LED-48  SEWTAP6  [PETAL-SMALL-2SIDE]  83.31,10.9 0 top
LED-49  SEWTAP6  [PETAL-SMALL-2SIDE]  88.9,10.9 0 top
LED-50  SEWTAP6  [PETAL-SMALL-2SIDE]  77.72,26.14 0 top
LED-51  SEWTAP6  [PETAL-SMALL-2SIDE]  55.37,26.14 0 top
LED-52  SEWTAP6  [PETAL-SMALL-2SIDE]  60.96,26.14 0 top
LED-53  SEWTAP6  [PETAL-SMALL-2SIDE]  66.55,26.14 0 top
LED-54  SEWTAP6  [PETAL-SMALL-2SIDE]  72.14,26.14 0 top
LED-55  SEWTAP6  [PETAL-SMALL-2SIDE]  83.31,26.14 0 top
LED-56  SEWTAP6  [PETAL-SMALL-2SIDE]  88.9,26.14 0 top
LED-57  SEWTAP6  [PETAL-SMALL-2SIDE]  77.72,41.38 0 top
LED-58  SEWTAP6  [PETAL-SMALL-2SIDE]  55.37,41.38 0 top
LED-59  SEWTAP6  [PETAL-SMALL-2SIDE]  60.96,41.38 0 top
LED-60  SEWTAP6  [PETAL-SMALL-2SIDE]  66.55,41.38 0 top
LED-61  SEWTAP6  [PETAL-SMALL-2SIDE]  72.14,41.38 0 top
LED-62  SEWTAP6  [PETAL-SMALL-2SIDE]  83.31,41.38 0 top
LED-63  SEWTAP6  [PETAL-SMALL-2SIDE]  88.9,41.38 0 top
LED-64  SEWTAP6  [PETAL-SMALL-2SIDE]  77.72,56.62 0 top
LED-65  SEWTAP6  [PETAL-SMALL-2SIDE]  55.37,56.62 0 top
LED-66  SEWTAP6  [PETAL-SMALL-2SIDE]  60.96,56.62 0 top
LED-67  SEWTAP6  [PETAL-SMALL-2SIDE]  66.55,56.62 0 top
LED-68  SEWTAP6  [PETAL-SMALL-2SIDE]  72.14,56.62 0 top
LED-69  SEWTAP6  [PETAL-SMALL-2SIDE]  83.31,56.62 0 top
LED-70  SEWTAP6  [PETAL-SMALL-2SIDE]  88.9,56.62 0 top
LED-71  SEWTAP6  [PETAL-SMALL-2SIDE]  77.72,71.86 0 top
LED-72  SEWTAP6  [PETAL-SMALL-2SIDE]  55.37,71.86 0 top
LED-73  SEWTAP6  [PETAL-SMALL-2SIDE]  60.96,71.86 0 top
LED-74  SEWTAP6  [PETAL-SMALL-2SIDE]  66.55,71.86 0 top
LED-75  SEWTAP6  [PETAL-SMALL-2SIDE]  72.14,71.86 0 top
LED-76  SEWTAP6  [PETAL-SMALL-2SIDE]  83.31,71.86 0 top
LED-77  SEWTAP6  [PETAL-SMALL-2SIDE]  88.9,71.86 0 top
LED-78  SEWTAP6  [PETAL-SMALL-2SIDE]  77.72,87.1 0 top
LED-79  SEWTAP6  [PETAL-SMALL-2SIDE]  55.37,87.1 0 top
LED-80  SEWTAP6  [PETAL-SMALL-2SIDE]  60.96,87.1 0 top
LED-81  SEWTAP6  [PETAL-SMALL-2SIDE]  66.55,87.1 0 top
LED-82  SEWTAP6  [PETAL-SMALL-2SIDE]  72.14,87.1 0 top
LED-83  SEWTAP6  [PETAL-SMALL-2SIDE]  83.31,87.1 0 top
LED-84  SEWTAP6  [PETAL-SMALL-2SIDE]  88.9,87.1 0 top
LED-85  SEWTAP6  [PETAL-SMALL-2SIDE]  123.7,10.9 0 top
LED-86  SEWTAP6  [PETAL-SMALL-2SIDE]  101.35,10.9 0 top
LED-87  SEWTAP6  [PETAL-SMALL-2SIDE]  106.93,10.9 0 top
LED-88  SEWTAP6  [PETAL-SMALL-2SIDE]  112.52,10.9 0 top
LED-89  SEWTAP6  [PETAL-SMALL-2SIDE]  118.11,10.9 0 top
LED-90  SEWTAP6  [PETAL-SMALL-2SIDE]  129.29,10.9 0 top
LED-91  SEWTAP6  [PETAL-SMALL-2SIDE]  134.87,10.9 0 top
LED-92  SEWTAP6  [PETAL-SMALL-2SIDE]  123.7,26.14 0 top
LED-93  SEWTAP6  [PETAL-SMALL-2SIDE]  101.35,26.14 0 top
LED-94  SEWTAP6  [PETAL-SMALL-2SIDE]  106.93,26.14 0 top
LED-95  SEWTAP6  [PETAL-SMALL-2SIDE]  112.52,26.14 0 top
LED-96  SEWTAP6  [PETAL-SMALL-2SIDE]  118.11,26.14 0 top
LED-97  SEWTAP6  [PETAL-SMALL-2SIDE]  129.29,26.14 0 top
LED-98  SEWTAP6  [PETAL-SMALL-2SIDE]  134.87,26.14 0 top
LED-99  SEWTAP6  [PETAL-SMALL-2SIDE]  123.7,41.38 0 top
LED-100  SEWTAP6  [PETAL-SMALL-2SIDE]  101.35,41.38 0 top
LED-101  SEWTAP6  [PETAL-SMALL-2SIDE]  106.93,41.38 0 top
LED-102  SEWTAP6  [PETAL-SMALL-2SIDE]  112.52,41.38 0 top
LED-103  SEWTAP6  [PETAL-SMALL-2SIDE]  118.11,41.38 0 top
LED-104  SEWTAP6  [PETAL-SMALL-2SIDE]  129.29,41.38 0 top
LED-105  SEWTAP6  [PETAL-SMALL-2SIDE]  134.87,41.38 0 top
LED-106  SEWTAP6  [PETAL-SMALL-2SIDE]  123.7,56.62 0 top
LED-107  SEWTAP6  [PETAL-SMALL-2SIDE]  101.35,56.62 0 top
LED-108  SEWTAP6  [PETAL-SMALL-2SIDE]  106.93,56.62 0 top
LED-109  SEWTAP6  [PETAL-SMALL-2SIDE]  112.52,56.62 0 top
LED-110  SEWTAP6  [PETAL-SMALL-2SIDE]  118.11,56.62 0 top
LED-111  SEWTAP6  [PETAL-SMALL-2SIDE]  129.29,56.62 0 top
LED-112  SEWTAP6  [PETAL-SMALL-2SIDE]  134.87,56.62 0 top
LED-113  SEWTAP6  [PETAL-SMALL-2SIDE]  123.7,71.86 0 top
LED-114  SEWTAP6  [PETAL-SMALL-2SIDE]  101.35,71.86 0 top
LED-115  SEWTAP6  [PETAL-SMALL-2SIDE]  106.93,71.86 0 top
LED-116  SEWTAP6  [PETAL-SMALL-2SIDE]  112.52,71.86 0 top
LED-117  SEWTAP6  [PETAL-SMALL-2SIDE]  118.11,71.86 0 top
LED-118  SEWTAP6  [PETAL-SMALL-2SIDE]  129.29,71.86 0 top
LED-119  SEWTAP6  [PETAL-SMALL-2SIDE]  134.87,71.86 0 top
LED-120  SEWTAP6  [PETAL-SMALL-2SIDE]  123.7,87.1 0 top
LED-121  SEWTAP6  [PETAL-SMALL-2SIDE]  101.35,87.1 0 top
LED-122  SEWTAP6  [PETAL-SMALL-2SIDE]  106.93,87.1 0 top
LED-123  SEWTAP6  [PETAL-SMALL-2SIDE]  112.52,87.1 0 top
LED-124  SEWTAP6  [PETAL-SMALL-2SIDE]  118.11,87.1 0 top
LED-125  SEWTAP6  [PETAL-SMALL-2SIDE]  129.29,87.1 0 top
LED-126  SEWTAP6  [PETAL-SMALL-2SIDE]  134.87,87.1 0 top
LED-127  SEWTAP6  [PETAL-SMALL-2SIDE]  169.67,10.9 0 top
LED-128  SEWTAP6  [PETAL-SMALL-2SIDE]  147.32,10.9 0 top
LED-129  SEWTAP6  [PETAL-SMALL-2SIDE]  152.91,10.9 0 top
LED-130  SEWTAP6  [PETAL-SMALL-2SIDE]  158.5,10.9 0 top
LED-131  SEWTAP6  [PETAL-SMALL-2SIDE]  164.08,10.9 0 top
LED-132  SEWTAP6  [PETAL-SMALL-2SIDE]  175.26,10.9 0 top
LED-133  SEWTAP6  [PETAL-SMALL-2SIDE]  180.85,10.9 0 top
LED-134  SEWTAP6  [PETAL-SMALL-2SIDE]  169.67,26.14 0 top
LED-135  SEWTAP6  [PETAL-SMALL-2SIDE]  147.32,26.14 0 top
LED-136  SEWTAP6  [PETAL-SMALL-2SIDE]  152.91,26.14 0 top
LED-137  SEWTAP6  [PETAL-SMALL-2SIDE]  158.5,26.14 0 top
LED-138  SEWTAP6  [PETAL-SMALL-2SIDE]  164.08,26.14 0 top
LED-139  SEWTAP6  [PETAL-SMALL-2SIDE]  175.26,26.14 0 top
LED-140  SEWTAP6  [PETAL-SMALL-2SIDE]  180.85,26.14 0 top
LED-141  SEWTAP6  [PETAL-SMALL-2SIDE]  169.67,41.38 0 top
LED-142  SEWTAP6  [PETAL-SMALL-2SIDE]  147.32,41.38 0 top
LED-143  SEWTAP6  [PETAL-SMALL-2SIDE]  152.91,41.38 0 top
LED-144  SEWTAP6  [PETAL-SMALL-2SIDE]  158.5,41.38 0 top
LED-145  SEWTAP6  [PETAL-SMALL-2SIDE]  164.08,41.38 0 top
LED-146  SEWTAP6  [PETAL-SMALL-2SIDE]  175.26,41.38 0 top
LED-147  SEWTAP6  [PETAL-SMALL-2SIDE]  180.85,41.38 0 top
LED-148  SEWTAP6  [PETAL-SMALL-2SIDE]  169.67,56.62 0 top
LED-149  SEWTAP6  [PETAL-SMALL-2SIDE]  147.32,56.62 0 top
LED-150  SEWTAP6  [PETAL-SMALL-2SIDE]  152.91,56.62 0 top
LED-151  SEWTAP6  [PETAL-SMALL-2SIDE]  158.5,56.62 0 top
LED-152  SEWTAP6  [PETAL-SMALL-2SIDE]  164.08,56.62 0 top
LED-153  SEWTAP6  [PETAL-SMALL-2SIDE]  175.26,56.62 0 top
LED-154  SEWTAP6  [PETAL-SMALL-2SIDE]  180.85,56.62 0 top
LED-155  SEWTAP6  [PETAL-SMALL-2SIDE]  169.67,71.86 0 top
LED-156  SEWTAP6  [PETAL-SMALL-2SIDE]  147.32,71.86 0 top
LED-157  SEWTAP6  [PETAL-SMALL-2SIDE]  152.91,71.86 0 top
LED-158  SEWTAP6  [PETAL-SMALL-2SIDE]  158.5,71.86 0 top
LED-159  SEWTAP6  [PETAL-SMALL-2SIDE]  164.08,71.86 0 top
LED-160  SEWTAP6  [PETAL-SMALL-2SIDE]  175.26,71.86 0 top
LED-161  SEWTAP6  [PETAL-SMALL-2SIDE]  180.85,71.86 0 top
LED-162  SEWTAP6  [PETAL-SMALL-2SIDE]  169.67,87.1 0 top
LED-163  SEWTAP6  [PETAL-SMALL-2SIDE]  147.32,87.1 0 top
LED-164  SEWTAP6  [PETAL-SMALL-2SIDE]  152.91,87.1 0 top
LED-165  SEWTAP6  [PETAL-SMALL-2SIDE]  158.5,87.1 0 top
LED-166  SEWTAP6  [PETAL-SMALL-2SIDE]  164.08,87.1 0 top
LED-167  SEWTAP6  [PETAL-SMALL-2SIDE]  175.26,87.1 0 top
LED-168  SEWTAP6  [PETAL-SMALL-2SIDE]  180.85,87.1 0 top
LED-169  SEWTAP6  [PETAL-SMALL-2SIDE]  215.65,10.9 0 top
LED-170  SEWTAP6  [PETAL-SMALL-2SIDE]  193.29,10.9 0 top
LED-171  SEWTAP6  [PETAL-SMALL-2SIDE]  198.88,10.9 0 top
LED-172  SEWTAP6  [PETAL-SMALL-2SIDE]  204.47,10.9 0 top
LED-173  SEWTAP6  [PETAL-SMALL-2SIDE]  210.06,10.9 0 top
LED-174  SEWTAP6  [PETAL-SMALL-2SIDE]  221.23,10.9 0 top
LED-175  SEWTAP6  [PETAL-SMALL-2SIDE]  226.82,10.9 0 top
LED-176  SEWTAP6  [PETAL-SMALL-2SIDE]  215.65,26.14 0 top
LED-177  SEWTAP6  [PETAL-SMALL-2SIDE]  193.29,26.14 0 top
LED-178  SEWTAP6  [PETAL-SMALL-2SIDE]  198.88,26.14 0 top
LED-179  SEWTAP6  [PETAL-SMALL-2SIDE]  204.47,26.14 0 top
LED-180  SEWTAP6  [PETAL-SMALL-2SIDE]  210.06,26.14 0 top
LED-181  SEWTAP6  [PETAL-SMALL-2SIDE]  221.23,26.14 0 top
LED-182  SEWTAP6  [PETAL-SMALL-2SIDE]  226.82,26.14 0 top
LED-183  SEWTAP6  [PETAL-SMALL-2SIDE]  215.65,41.38 0 top
LED-184  SEWTAP6  [PETAL-SMALL-2SIDE]  193.29,41.38 0 top
LED-185  SEWTAP6  [PETAL-SMALL-2SIDE]  198.88,41.38 0 top
LED-186  SEWTAP6  [PETAL-SMALL-2SIDE]  204.47,41.38 0 top
LED-187  SEWTAP6  [PETAL-SMALL-2SIDE]  210.06,41.38 0 top
LED-188  SEWTAP6  [PETAL-SMALL-2SIDE]  221.23,41.38 0 top
LED-189  SEWTAP6  [PETAL-SMALL-2SIDE]  226.82,41.38 0 top
LED-190  SEWTAP6  [PETAL-SMALL-2SIDE]  215.65,56.62 0 top
LED-191  SEWTAP6  [PETAL-SMALL-2SIDE]  193.29,56.62 0 top
LED-192  SEWTAP6  [PETAL-SMALL-2SIDE]  198.88,56.62 0 top
LED-193  SEWTAP6  [PETAL-SMALL-2SIDE]  204.47,56.62 0 top
LED-194  SEWTAP6  [PETAL-SMALL-2SIDE]  210.06,56.62 0 top
LED-195  SEWTAP6  [PETAL-SMALL-2SIDE]  221.23,56.62 0 top
LED-196  SEWTAP6  [PETAL-SMALL-2SIDE]  226.82,56.62 0 top
LED-197  SEWTAP6  [PETAL-SMALL-2SIDE]  215.65,71.86 0 top
LED-198  SEWTAP6  [PETAL-SMALL-2SIDE]  193.29,71.86 0 top
LED-199  SEWTAP6  [PETAL-SMALL-2SIDE]  198.88,71.86 0 top
LED-200  SEWTAP6  [PETAL-SMALL-2SIDE]  204.47,71.86 0 top
LED-201  SEWTAP6  [PETAL-SMALL-2SIDE]  210.06,71.86 0 top
LED-202  SEWTAP6  [PETAL-SMALL-2SIDE]  221.23,71.86 0 top
LED-203  SEWTAP6  [PETAL-SMALL-2SIDE]  226.82,71.86 0 top
LED-204  SEWTAP6  [PETAL-SMALL-2SIDE]  215.65,87.1 0 top
LED-205  SEWTAP6  [PETAL-SMALL-2SIDE]  193.29,87.1 0 top
LED-206  SEWTAP6  [PETAL-SMALL-2SIDE]  198.88,87.1 0 top
LED-207  SEWTAP6  [PETAL-SMALL-2SIDE]  204.47,87.1 0 top
LED-208  SEWTAP6  [PETAL-SMALL-2SIDE]  210.06,87.1 0 top
LED-209  SEWTAP6  [PETAL-SMALL-2SIDE]  221.23,87.1 0 top
LED-210  SEWTAP6  [PETAL-SMALL-2SIDE]  226.82,87.1 0 top
LOGO1  LOGO-LPL  [LOGO-L]  31.75,30.15 0 bottom
LOGO2  LOGO-LPL  [LOGO-L]  9.47,30.18 0 bottom
LOGO3  LOGO-LPL  [LOGO-L]  15.04,30.12 0 bottom
LOGO4  LOGO-LPL  [LOGO-L]  20.6,30.2 0 bottom
LOGO5  LOGO-LPL  [LOGO-L]  26.19,30.12 0 bottom
LOGO6  LOGO-LPL  [LOGO-L]  37.34,30.12 0 bottom
LOGO7  LOGO-LPL  [LOGO-L]  42.98,30.18 0 bottom
LOGO8  LOGO-LPL  [LOGO-L]  31.75,45.39 0 bottom
LOGO9  LOGO-LPL  [LOGO-L]  9.47,45.42 0 bottom
LOGO10  LOGO-LPL  [LOGO-L]  15.04,45.36 0 bottom
LOGO11  LOGO-LPL  [LOGO-L]  20.6,45.44 0 bottom
LOGO12  LOGO-LPL  [LOGO-L]  26.19,45.36 0 bottom
LOGO13  LOGO-LPL  [LOGO-L]  37.34,45.36 0 bottom
LOGO14  LOGO-LPL  [LOGO-L]  42.98,45.42 0 bottom
LOGO15  LOGO-LPL  [LOGO-L]  31.75,60.63 0 bottom
LOGO16  LOGO-LPL  [LOGO-L]  9.47,60.66 0 bottom
LOGO17  LOGO-LPL  [LOGO-L]  15.04,60.6 0 bottom
LOGO18  LOGO-LPL  [LOGO-L]  20.6,60.68 0 bottom
LOGO19  LOGO-LPL  [LOGO-L]  26.19,60.6 0 bottom
LOGO20  LOGO-LPL  [LOGO-L]  37.34,60.6 0 bottom
LOGO21  LOGO-LPL  [LOGO-L]  42.98,60.66 0 bottom
LOGO22  LOGO-LPL  [LOGO-L]  31.75,75.87 0 bottom
LOGO23  LOGO-LPL  [LOGO-L]  9.47,75.9 0 bottom
LOGO24  LOGO-LPL  [LOGO-L]  15.04,75.84 0 bottom
LOGO25  LOGO-LPL  [LOGO-L]  20.6,75.92 0 bottom
LOGO26  LOGO-LPL  [LOGO-L]  26.19,75.84 0 bottom
LOGO27  LOGO-LPL  [LOGO-L]  37.34,75.84 0 bottom
LOGO28  LOGO-LPL  [LOGO-L]  42.98,75.9 0 bottom
LOGO29  LOGO-LPL  [LOGO-L]  31.75,14.91 0 bottom
LOGO30  LOGO-LPL  [LOGO-L]  9.47,14.94 0 bottom
LOGO31  LOGO-LPL  [LOGO-L]  15.04,14.88 0 bottom
LOGO32  LOGO-LPL  [LOGO-L]  20.6,14.96 0 bottom
LOGO33  LOGO-LPL  [LOGO-L]  26.19,14.88 0 bottom
LOGO34  LOGO-LPL  [LOGO-L]  37.34,14.88 0 bottom
LOGO35  LOGO-LPL  [LOGO-L]  42.98,14.94 0 bottom
LOGO36  LOGO-LPL  [LOGO-L]  31.75,91.11 0 bottom
LOGO37  LOGO-LPL  [LOGO-L]  9.47,91.14 0 bottom
LOGO38  LOGO-LPL  [LOGO-L]  15.04,91.08 0 bottom
LOGO39  LOGO-LPL  [LOGO-L]  20.6,91.16 0 bottom
LOGO40  LOGO-LPL  [LOGO-L]  26.19,91.08 0 bottom
LOGO41  LOGO-LPL  [LOGO-L]  37.34,91.08 0 bottom
LOGO42  LOGO-LPL  [LOGO-L]  42.98,91.14 0 bottom
LOGO43  LOGO-LPL  [LOGO-L]  77.72,14.91 0 bottom
LOGO44  LOGO-LPL  [LOGO-L]  55.45,14.94 0 bottom
LOGO45  LOGO-LPL  [LOGO-L]  61.01,14.88 0 bottom
LOGO46  LOGO-LPL  [LOGO-L]  66.57,14.96 0 bottom
LOGO47  LOGO-LPL  [LOGO-L]  72.16,14.88 0 bottom
LOGO48  LOGO-LPL  [LOGO-L]  83.31,14.88 0 bottom
LOGO49  LOGO-LPL  [LOGO-L]  88.95,14.94 0 bottom
LOGO50  LOGO-LPL  [LOGO-L]  77.72,30.15 0 bottom
LOGO51  LOGO-LPL  [LOGO-L]  55.45,30.18 0 bottom
LOGO52  LOGO-LPL  [LOGO-L]  61.01,30.12 0 bottom
LOGO53  LOGO-LPL  [LOGO-L]  66.57,30.2 0 bottom
LOGO54  LOGO-LPL  [LOGO-L]  72.16,30.12 0 bottom
LOGO55  LOGO-LPL  [LOGO-L]  83.31,30.12 0 bottom
LOGO56  LOGO-LPL  [LOGO-L]  88.95,30.18 0 bottom
LOGO57  LOGO-LPL  [LOGO-L]  77.72,45.39 0 bottom
LOGO58  LOGO-LPL  [LOGO-L]  55.45,45.42 0 bottom
LOGO59  LOGO-LPL  [LOGO-L]  61.01,45.36 0 bottom
LOGO60  LOGO-LPL  [LOGO-L]  66.57,45.44 0 bottom
LOGO61  LOGO-LPL  [LOGO-L]  72.16,45.36 0 bottom
LOGO62  LOGO-LPL  [LOGO-L]  83.31,45.36 0 bottom
LOGO63  LOGO-LPL  [LOGO-L]  88.95,45.42 0 bottom
LOGO64  LOGO-LPL  [LOGO-L]  77.72,60.63 0 bottom
LOGO65  LOGO-LPL  [LOGO-L]  55.45,60.66 0 bottom
LOGO66  LOGO-LPL  [LOGO-L]  61.01,60.6 0 bottom
LOGO67  LOGO-LPL  [LOGO-L]  66.57,60.68 0 bottom
LOGO68  LOGO-LPL  [LOGO-L]  72.16,60.6 0 bottom
LOGO69  LOGO-LPL  [LOGO-L]  83.31,60.6 0 bottom
LOGO70  LOGO-LPL  [LOGO-L]  88.95,60.66 0 bottom
LOGO71  LOGO-LPL  [LOGO-L]  77.72,75.87 0 bottom
LOGO72  LOGO-LPL  [LOGO-L]  55.45,75.9 0 bottom
LOGO73  LOGO-LPL  [LOGO-L]  61.01,75.84 0 bottom
LOGO74  LOGO-LPL  [LOGO-L]  66.57,75.92 0 bottom
LOGO75  LOGO-LPL  [LOGO-L]  72.16,75.84 0 bottom
LOGO76  LOGO-LPL  [LOGO-L]  83.31,75.84 0 bottom
LOGO77  LOGO-LPL  [LOGO-L]  88.95,75.9 0 bottom
LOGO78  LOGO-LPL  [LOGO-L]  77.72,91.11 0 bottom
LOGO79  LOGO-LPL  [LOGO-L]  55.45,91.14 0 bottom
LOGO80  LOGO-LPL  [LOGO-L]  61.01,91.08 0 bottom
LOGO81  LOGO-LPL  [LOGO-L]  66.57,91.16 0 bottom
LOGO82  LOGO-LPL  [LOGO-L]  72.16,91.08 0 bottom
LOGO83  LOGO-LPL  [LOGO-L]  83.31,91.08 0 bottom
LOGO84  LOGO-LPL  [LOGO-L]  88.95,91.14 0 bottom
LOGO85  LOGO-LPL  [LOGO-L]  123.7,14.91 0 bottom
LOGO86  LOGO-LPL  [LOGO-L]  101.42,14.94 0 bottom
LOGO87  LOGO-LPL  [LOGO-L]  106.98,14.88 0 bottom
LOGO88  LOGO-LPL  [LOGO-L]  112.55,14.96 0 bottom
LOGO89  LOGO-LPL  [LOGO-L]  118.14,14.88 0 bottom
LOGO90  LOGO-LPL  [LOGO-L]  129.29,14.88 0 bottom
LOGO91  LOGO-LPL  [LOGO-L]  134.92,14.94 0 bottom
LOGO92  LOGO-LPL  [LOGO-L]  123.7,30.15 0 bottom
LOGO93  LOGO-LPL  [LOGO-L]  101.42,30.18 0 bottom
LOGO94  LOGO-LPL  [LOGO-L]  106.98,30.12 0 bottom
LOGO95  LOGO-LPL  [LOGO-L]  112.55,30.2 0 bottom
LOGO96  LOGO-LPL  [LOGO-L]  118.14,30.12 0 bottom
LOGO97  LOGO-LPL  [LOGO-L]  129.29,30.12 0 bottom
LOGO98  LOGO-LPL  [LOGO-L]  134.92,30.18 0 bottom
LOGO99  LOGO-LPL  [LOGO-L]  123.7,45.39 0 bottom
LOGO100  LOGO-LPL  [LOGO-L]  101.42,45.42 0 bottom
LOGO101  LOGO-LPL  [LOGO-L]  106.98,45.36 0 bottom
LOGO102  LOGO-LPL  [LOGO-L]  112.55,45.44 0 bottom
LOGO103  LOGO-LPL  [LOGO-L]  118.14,45.36 0 bottom
LOGO104  LOGO-LPL  [LOGO-L]  129.29,45.36 0 bottom
LOGO105  LOGO-LPL  [LOGO-L]  134.92,45.42 0 bottom
LOGO106  LOGO-LPL  [LOGO-L]  123.7,60.63 0 bottom
LOGO107  LOGO-LPL  [LOGO-L]  101.42,60.66 0 bottom
LOGO108  LOGO-LPL  [LOGO-L]  106.98,60.6 0 bottom
LOGO109  LOGO-LPL  [LOGO-L]  112.55,60.68 0 bottom
LOGO110  LOGO-LPL  [LOGO-L]  118.14,60.6 0 bottom
LOGO111  LOGO-LPL  [LOGO-L]  129.29,60.6 0 bottom
LOGO112  LOGO-LPL  [LOGO-L]  134.92,60.66 0 bottom
LOGO113  LOGO-LPL  [LOGO-L]  123.7,75.87 0 bottom
LOGO114  LOGO-LPL  [LOGO-L]  101.42,75.9 0 bottom
LOGO115  LOGO-LPL  [LOGO-L]  106.98,75.84 0 bottom
LOGO116  LOGO-LPL  [LOGO-L]  112.55,75.92 0 bottom
LOGO117  LOGO-LPL  [LOGO-L]  118.14,75.84 0 bottom
LOGO118  LOGO-LPL  [LOGO-L]  129.29,75.84 0 bottom
LOGO119  LOGO-LPL  [LOGO-L]  134.92,75.9 0 bottom
LOGO120  LOGO-LPL  [LOGO-L]  123.7,91.11 0 bottom
LOGO121  LOGO-LPL  [LOGO-L]  101.42,91.14 0 bottom
LOGO122  LOGO-LPL  [LOGO-L]  106.98,91.08 0 bottom
LOGO123  LOGO-LPL  [LOGO-L]  112.55,91.16 0 bottom
LOGO124  LOGO-LPL  [LOGO-L]  118.14,91.08 0 bottom
LOGO125  LOGO-LPL  [LOGO-L]  129.29,91.08 0 bottom
LOGO126  LOGO-LPL  [LOGO-L]  134.92,91.14 0 bottom
LOGO127  LOGO-LPL  [LOGO-L]  169.67,14.91 0 bottom
LOGO128  LOGO-LPL  [LOGO-L]  147.4,14.94 0 bottom
LOGO129  LOGO-LPL  [LOGO-L]  152.96,14.88 0 bottom
LOGO130  LOGO-LPL  [LOGO-L]  158.52,14.96 0 bottom
LOGO131  LOGO-LPL  [LOGO-L]  164.11,14.88 0 bottom
LOGO132  LOGO-LPL  [LOGO-L]  175.26,14.88 0 bottom
LOGO133  LOGO-LPL  [LOGO-L]  180.9,14.94 0 bottom
LOGO134  LOGO-LPL  [LOGO-L]  169.67,30.15 0 bottom
LOGO135  LOGO-LPL  [LOGO-L]  147.4,30.18 0 bottom
LOGO136  LOGO-LPL  [LOGO-L]  152.96,30.12 0 bottom
LOGO137  LOGO-LPL  [LOGO-L]  158.52,30.2 0 bottom
LOGO138  LOGO-LPL  [LOGO-L]  164.11,30.12 0 bottom
LOGO139  LOGO-LPL  [LOGO-L]  175.26,30.12 0 bottom
LOGO140  LOGO-LPL  [LOGO-L]  180.9,30.18 0 bottom
LOGO141  LOGO-LPL  [LOGO-L]  169.67,45.39 0 bottom
LOGO142  LOGO-LPL  [LOGO-L]  147.4,45.42 0 bottom
LOGO143  LOGO-LPL  [LOGO-L]  152.96,45.36 0 bottom
LOGO144  LOGO-LPL  [LOGO-L]  158.52,45.44 0 bottom
LOGO145  LOGO-LPL  [LOGO-L]  164.11,45.36 0 bottom
LOGO146  LOGO-LPL  [LOGO-L]  175.26,45.36 0 bottom
LOGO147  LOGO-LPL  [LOGO-L]  180.9,45.42 0 bottom
LOGO148  LOGO-LPL  [LOGO-L]  169.67,60.63 0 bottom
LOGO149  LOGO-LPL  [LOGO-L]  147.4,60.66 0 bottom
LOGO150  LOGO-LPL  [LOGO-L]  152.96,60.6 0 bottom
LOGO151  LOGO-LPL  [LOGO-L]  158.52,60.68 0 bottom
LOGO152  LOGO-LPL  [LOGO-L]  164.11,60.6 0 bottom
LOGO153  LOGO-LPL  [LOGO-L]  175.26,60.6 0 bottom
LOGO154  LOGO-LPL  [LOGO-L]  180.9,60.66 0 bottom
LOGO155  LOGO-LPL  [LOGO-L]  169.67,75.87 0 bottom
LOGO156  LOGO-LPL  [LOGO-L]  147.4,75.9 0 bottom
LOGO157  LOGO-LPL  [LOGO-L]  152.96,75.84 0 bottom
LOGO158  LOGO-LPL  [LOGO-L]  158.52,75.92 0 bottom
LOGO159  LOGO-LPL  [LOGO-L]  164.11,75.84 0 bottom
LOGO160  LOGO-LPL  [LOGO-L]  175.26,75.84 0 bottom
LOGO161  LOGO-LPL  [LOGO-L]  180.9,75.9 0 bottom
LOGO162  LOGO-LPL  [LOGO-L]  169.67,91.11 0 bottom
LOGO163  LOGO-LPL  [LOGO-L]  147.4,91.14 0 bottom
LOGO164  LOGO-LPL  [LOGO-L]  152.96,91.08 0 bottom
LOGO165  LOGO-LPL  [LOGO-L]  158.52,91.16 0 bottom
LOGO166  LOGO-LPL  [LOGO-L]  164.11,91.08 0 bottom
LOGO167  LOGO-LPL  [LOGO-L]  175.26,91.08 0 bottom
LOGO168  LOGO-LPL  [LOGO-L]  180.9,91.14 0 bottom
LOGO169  LOGO-LPL  [LOGO-L]  215.65,14.91 0 bottom
LOGO170  LOGO-LPL  [LOGO-L]  193.37,14.94 0 bottom
LOGO171  LOGO-LPL  [LOGO-L]  198.93,14.88 0 bottom
LOGO172  LOGO-LPL  [LOGO-L]  204.5,14.96 0 bottom
LOGO173  LOGO-LPL  [LOGO-L]  210.08,14.88 0 bottom
LOGO174  LOGO-LPL  [LOGO-L]  221.23,14.88 0 bottom
LOGO175  LOGO-LPL  [LOGO-L]  226.87,14.94 0 bottom
LOGO176  LOGO-LPL  [LOGO-L]  215.65,30.15 0 bottom
LOGO177  LOGO-LPL  [LOGO-L]  193.37,30.18 0 bottom
LOGO178  LOGO-LPL  [LOGO-L]  198.93,30.12 0 bottom
LOGO179  LOGO-LPL  [LOGO-L]  204.5,30.2 0 bottom
LOGO180  LOGO-LPL  [LOGO-L]  210.08,30.12 0 bottom
LOGO181  LOGO-LPL  [LOGO-L]  221.23,30.12 0 bottom
LOGO182  LOGO-LPL  [LOGO-L]  226.87,30.18 0 bottom
LOGO183  LOGO-LPL  [LOGO-L]  215.65,45.39 0 bottom
LOGO184  LOGO-LPL  [LOGO-L]  193.37,45.42 0 bottom
LOGO185  LOGO-LPL  [LOGO-L]  198.93,45.36 0 bottom
LOGO186  LOGO-LPL  [LOGO-L]  204.5,45.44 0 bottom
LOGO187  LOGO-LPL  [LOGO-L]  210.08,45.36 0 bottom
LOGO188  LOGO-LPL  [LOGO-L]  221.23,45.36 0 bottom
LOGO189  LOGO-LPL  [LOGO-L]  226.87,45.42 0 bottom
LOGO190  LOGO-LPL  [LOGO-L]  215.65,60.63 0 bottom
LOGO191  LOGO-LPL  [LOGO-L]  193.37,60.66 0 bottom
LOGO192  LOGO-LPL  [LOGO-L]  198.93,60.6 0 bottom
LOGO193  LOGO-LPL  [LOGO-L]  204.5,60.68 0 bottom
LOGO194  LOGO-LPL  [LOGO-L]  210.08,60.6 0 bottom
LOGO195  LOGO-LPL  [LOGO-L]  221.23,60.6 0 bottom
LOGO196  LOGO-LPL  [LOGO-L]  226.87,60.66 0 bottom
LOGO197  LOGO-LPL  [LOGO-L]  215.65,75.87 0 bottom
LOGO198  LOGO-LPL  [LOGO-L]  193.37,75.9 0 bottom
LOGO199  LOGO-LPL  [LOGO-L]  198.93,75.84 0 bottom
LOGO200  LOGO-LPL  [LOGO-L]  204.5,75.92 0 bottom
LOGO201  LOGO-LPL  [LOGO-L]  210.08,75.84 0 bottom
LOGO202  LOGO-LPL  [LOGO-L]  221.23,75.84 0 bottom
LOGO203  LOGO-LPL  [LOGO-L]  226.87,75.9 0 bottom
LOGO204  LOGO-LPL  [LOGO-L]  215.65,91.11 0 bottom
LOGO205  LOGO-LPL  [LOGO-L]  193.37,91.14 0 bottom
LOGO206  LOGO-LPL  [LOGO-L]  198.93,91.08 0 bottom
LOGO207  LOGO-LPL  [LOGO-L]  204.5,91.16 0 bottom
LOGO208  LOGO-LPL  [LOGO-L]  210.08,91.08 0 bottom
LOGO209  LOGO-LPL  [LOGO-L]  221.23,91.08 0 bottom
LOGO210  LOGO-LPL  [LOGO-L]  226.87,91.14 0 bottom
R1  150  [0603-RES]  42.91,13.64 0 top
R2  150  [0603-RES]  37.32,13.64 0 top
R3  150  [0603-RES]  31.73,13.64 0 top
R4  150  [0603-RES]  26.14,13.64 0 top
R5  150  [0603-RES]  20.55,13.64 0 top
R6  150  [0603-RES]  14.97,13.64 0 top
R7  150  [0603-RES]  9.38,13.64 0 top
R8  150  [0603-RES]  31.73,28.88 0 top
R9  150  [0603-RES]  9.38,28.88 0 top
R10  150  [0603-RES]  14.97,28.88 0 top
R11  150  [0603-RES]  20.55,28.88 0 top
R12  150  [0603-RES]  26.14,28.88 0 top
R13  150  [0603-RES]  37.32,28.88 0 top
R14  150  [0603-RES]  42.91,28.88 0 top
R15  150  [0603-RES]  31.73,44.12 0 top
R16  150  [0603-RES]  9.38,44.12 0 top
R17  150  [0603-RES]  14.97,44.12 0 top
R18  150  [0603-RES]  20.55,44.12 0 top
R19  150  [0603-RES]  26.14,44.12 0 top
R20  150  [0603-RES]  37.32,44.12 0 top
R21  150  [0603-RES]  42.91,44.12 0 top
R22  150  [0603-RES]  31.73,59.36 0 top
R23  150  [0603-RES]  9.38,59.36 0 top
R24  150  [0603-RES]  14.97,59.36 0 top
R25  150  [0603-RES]  20.55,59.36 0 top
R26  150  [0603-RES]  26.14,59.36 0 top
R27  150  [0603-RES]  37.32,59.36 0 top
R28  150  [0603-RES]  42.91,59.36 0 top
R29  150  [0603-RES]  31.73,74.6 0 top
R30  150  [0603-RES]  9.38,74.6 0 top
R31  150  [0603-RES]  14.97,74.6 0 top
R32  150  [0603-RES]  20.55,74.6 0 top
R33  150  [0603-RES]  26.14,74.6 0 top
R34  150  [0603-RES]  37.32,74.6 0 top
R35  150  [0603-RES]  42.91,74.6 0 top
R36  150  [0603-RES]  31.73,89.84 0 top
R37  150  [0603-RES]  9.38,89.84 0 top
R38  150  [0603-RES]  14.97,89.84 0 top
R39  150  [0603-RES]  20.55,89.84 0 top
R40  150  [0603-RES]  26.14,89.84 0 top
R41  150  [0603-RES]  37.32,89.84 0 top
R42  150  [0603-RES]  42.91,89.84 0 top
R43  150  [0603-RES]  77.7,13.64 0 top
R44  150  [0603-RES]  55.35,13.64 0 top
R45  150  [0603-RES]  60.94,13.64 0 top
R46  150  [0603-RES]  66.53,13.64 0 top
R47  150  [0603-RES]  72.12,13.64 0 top
R48  150  [0603-RES]  83.29,13.64 0 top
R49  150  [0603-RES]  88.88,13.64 0 top
R50  150  [0603-RES]  77.7,28.88 0 top
R51  150  [0603-RES]  55.35,28.88 0 top
R52  150  [0603-RES]  60.94,28.88 0 top
R53  150  [0603-RES]  66.53,28.88 0 top
R54  150  [0603-RES]  72.12,28.88 0 top
R55  150  [0603-RES]  83.29,28.88 0 top
R56  150  [0603-RES]  88.88,28.88 0 top
R57  150  [0603-RES]  77.7,44.12 0 top
R58  150  [0603-RES]  55.35,44.12 0 top
R59  150  [0603-RES]  60.94,44.12 0 top
R60  150  [0603-RES]  66.53,44.12 0 top
R61  150  [0603-RES]  72.12,44.12 0 top
R62  150  [0603-RES]  83.29,44.12 0 top
R63  150  [0603-RES]  88.88,44.12 0 top
R64  150  [0603-RES]  77.7,59.36 0 top
R65  150  [0603-RES]  55.35,59.36 0 top
R66  150  [0603-RES]  60.94,59.36 0 top
R67  150  [0603-RES]  66.53,59.36 0 top
R68  150  [0603-RES]  72.12,59.36 0 top
R69  150  [0603-RES]  83.29,59.36 0 top
R70  150  [0603-RES]  88.88,59.36 0 top
R71  150  [0603-RES]  77.7,74.6 0 top
R72  150  [0603-RES]  55.35,74.6 0 top
R73  150  [0603-RES]  60.94,74.6 0 top
R74  150  [0603-RES]  66.53,74.6 0 top
R75  150  [0603-RES]  72.12,74.6 0 top
R76  150  [0603-RES]  83.29,74.6 0 top
R77  150  [0603-RES]  88.88,74.6 0 top
R78  150  [0603-RES]  77.7,89.84 0 top
R79  150  [0603-RES]  55.35,89.84 0 top
R80  150  [0603-RES]  60.94,89.84 0 top
R81  150  [0603-RES]  66.53,89.84 0 top
R82  150  [0603-RES]  72.12,89.84 0 top
R83  150  [0603-RES]  83.29,89.84 0 top
R84  150  [0603-RES]  88.88,89.84 0 top
R85  150  [0603-RES]  123.68,13.64 0 top
R86  150  [0603-RES]  101.33,13.64 0 top
R87  150  [0603-RES]  106.91,13.64 0 top
R88  150  [0603-RES]  112.5,13.64 0 top
R89  150  [0603-RES]  118.09,13.64 0 top
R90  150  [0603-RES]  129.27,13.64 0 top
R91  150  [0603-RES]  134.85,13.64 0 top
R92  150  [0603-RES]  123.68,28.88 0 top
R93  150  [0603-RES]  101.33,28.88 0 top
R94  150  [0603-RES]  106.91,28.88 0 top
R95  150  [0603-RES]  112.5,28.88 0 top
R96  150  [0603-RES]  118.09,28.88 0 top
R97  150  [0603-RES]  129.27,28.88 0 top
R98  150  [0603-RES]  134.85,28.88 0 top
R99  150  [0603-RES]  123.68,44.12 0 top
R100  150  [0603-RES]  101.33,44.12 0 top
R101  150  [0603-RES]  106.91,44.12 0 top
R102  150  [0603-RES]  112.5,44.12 0 top
R103  150  [0603-RES]  118.09,44.12 0 top